# Altium PCB Mega-charger.PCBDOC
Units mil, origin at the board's own origin, x right, y up, seen from the top; angles counter-clockwise.
Board outline 6000 x 4000 mil, 2 copper layers (Top Layer, Bottom Layer); 3 components, 4 nets, 39 pads, 0 vias.
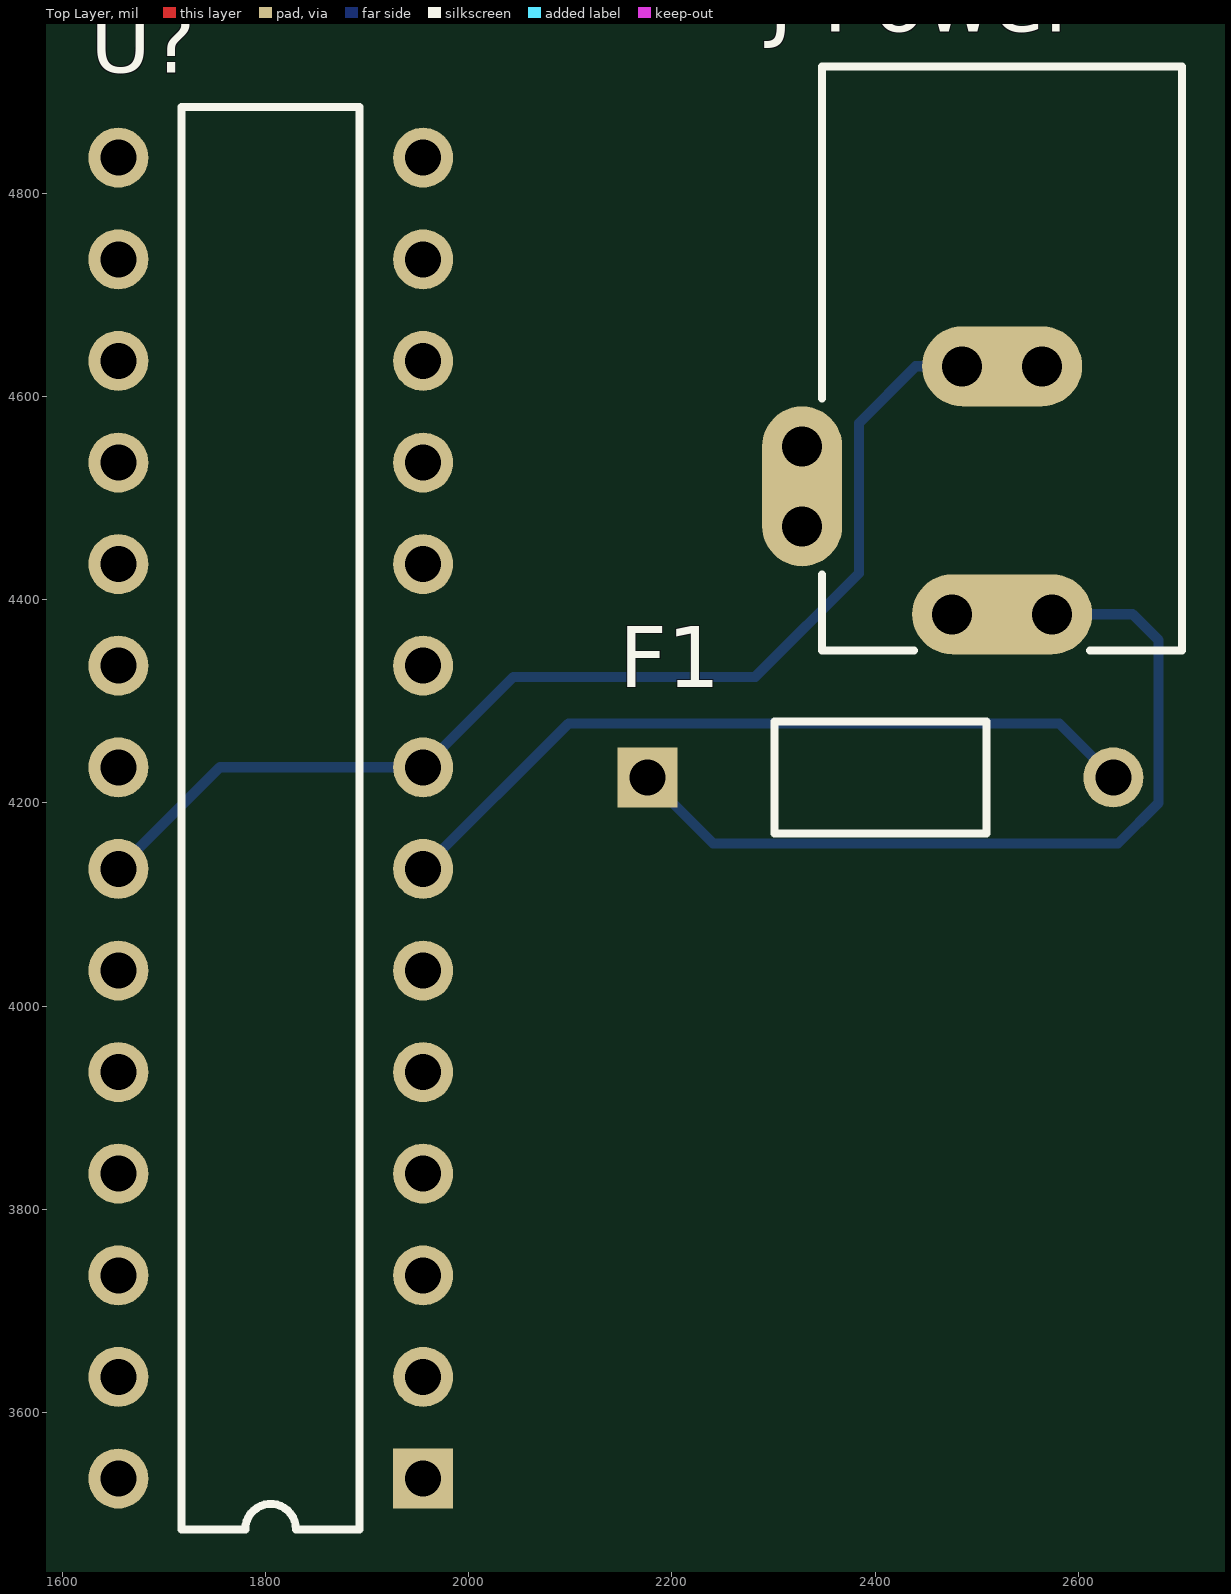
[diagram p0: Top Layer view]
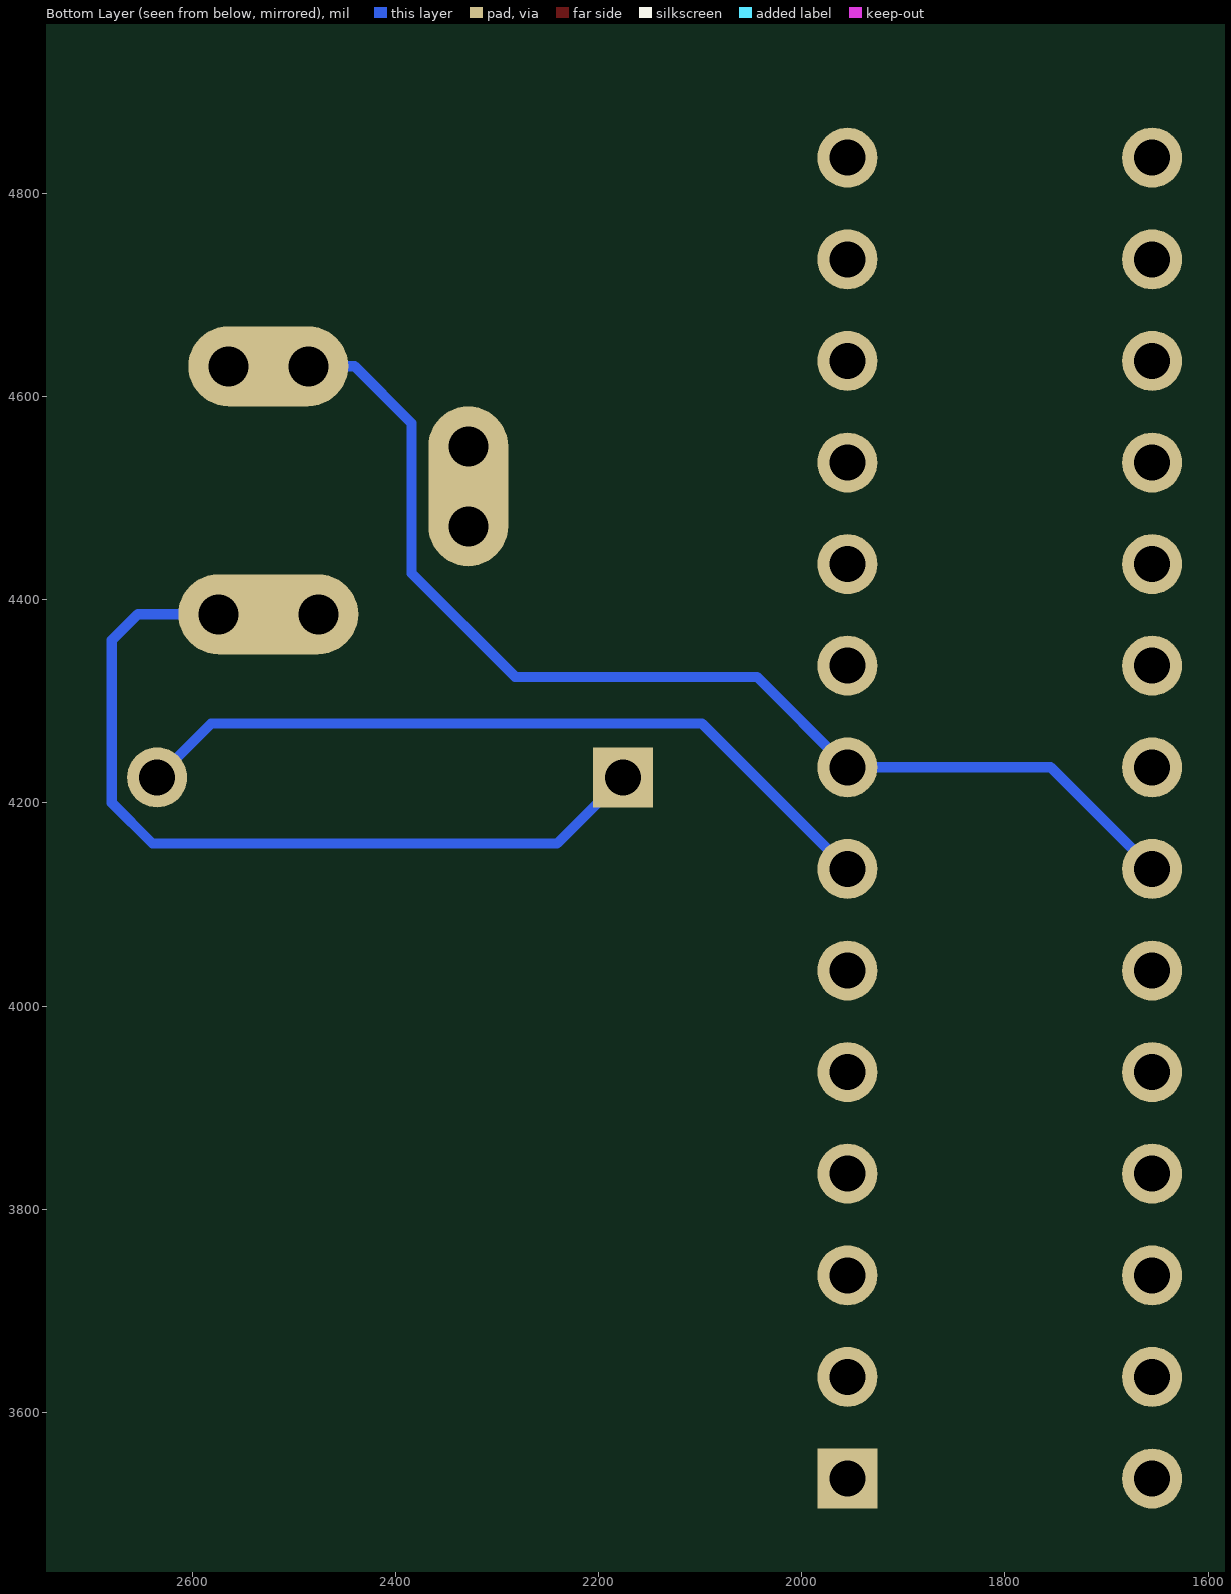
[diagram p1: Bottom Layer view, seen from below]

## Layer stack, top to bottom
Top Layer: signal copper 1.4
Dielectric: dielectric 12.6, FR-4, Dk 4.8
Bottom Layer: signal copper 1.4

## Board outline
1000,1000 7000,1000 7000,5000 1000,5000

## Design rules (kind name [scope] priority, off if disabled: settings)
Clearance [All] p1: gap=10
ComponentClearance [All] p1: gap=10 collisioncheckmode=3 verticalgap=10
PolygonConnect [All] p1: connectstyle=Relief reliefconductorwidth=10 reliefentries=4 polygonreliefangle="90 Angle"
RoomDefinition Mega-charger [InComponentClass('Mega-charger')] p1: confinementstyle=ConfineIn formatcopy=TRUE lockcomponents=FALSE outline 1605,3445 2730,3445 2730,4965 1605,4965
RoutingLayers [All] p1: top layer_v5=FALSE bottom layer_v5=TRUE
RoutingVias [All] p1: holewidth=28 width=50 viastyle="Through Hole" minholewidth=28 minwidth=50 maxholewidth=28 maxwidth=50
SolderMaskExpansion [All] p1: expansion=4
TestPointUsage [All] p1: valid=0 allowmultiple=FALSE
Testpoint [All] p1: side=15 testpointundercomponent=TRUE minsize=40 maxsize=100 preferedsize=60 minholesize=0 maxholesize=40 preferedholesize=32 testpointgrid=1 style=1023 order=0-112345678
Width [All] p1: maxlimit=10 minlimit=10 preferedwidth=10
16 further rules are at their usual default settings.

## Components (designator, comment, footprint, x,y, rotation, side; value= is the part's Value field where it differs from the comment)
F1 "Fuse 1" PIN-W2/E2.8 2405,4225 r0 top
J-Power "PWR2.5" KLD-0202 2525,4925 r270 top
U? "ATmega8L-8PC" 28P3 1805,4185 r90 top

## Footprints (in the part's own frame and the unit in brackets; to place one, negate y for a bottom-side part, rotate by r counter-clockwise, add the part's x,y. Pads: shape width x height; smd on the part's side, far side on the other; paste and mask are expansions set on the pad)
28P3 [mm] "DIP; 28 Leads; Row Spacing 7.62 mm; Pitch 2.54 mm"
  rect 1.5x1.5 hole 0.9: 1(-16.51,-3.81)
  round 1.5 hole 0.9: 2(-13.97,-3.81) 3(-11.43,-3.81) 4(-8.89,-3.81) 5(-6.35,-3.81) 6(-3.81,-3.81) 7(-1.27,-3.81) 8(1.27,-3.81) 9(3.81,-3.81) 10(6.35,-3.81) 11(8.89,-3.81) 12(11.43,-3.81) 13(13.97,-3.81) 14(16.51,-3.81) 15(16.51,3.81) 16(13.97,3.81) 17(11.43,3.81) 18(8.89,3.81) 19(6.35,3.81) 20(3.81,3.81) 21(1.27,3.81) 22(-1.27,3.81) 23(-3.81,3.81) 24(-6.35,3.81) 25(-8.89,3.81) 26(-11.43,3.81) 27(-13.97,3.81) 28(-16.51,3.81)
  silkscreen extent -17.78,-2.22 17.78,2.22
KLD-0202 [mm] "DC Power Jack, 2.5mm, KLD Series, PCB Mount"
  oval 2x4.5 all layers, no hole: 1(13.7,0)
  round 1.5 hole 1: 1A(13.7,-1.25) 1B(13.7,1.25) 2A(7.5,-1) 2B(7.5,1) 3A(9.5,-5) 3B(11.5,-5)
  oval 2x4 all layers, no hole: 2(7.5,0)
  oval 4x2 all layers, no hole: 3(10.5,-5)
  silkscreen extent 0,-4.5 14.6,4.5
PIN-W2/E2.8 [mm] "Fuse; 2 Leads"
  rect 1.5x1.5 hole 0.9: 1(-5.825,0)
  round 1.5 hole 0.9: 2(5.825,0)
  silkscreen extent -2.65,-1.4 2.65,1.4

## Part data
F1: "Fuse"
J-Power: "Low Voltage Power Supply Connector"
U?: "8-Bit AVR Microcontroller with 8K Bytes of In-System Programmable Flash Memory"

## Nets (pads, with @x,y where several pads share a name; then routed paths per layer and width w, separated by ;. In a path a pad name is that pad's centre, name@x,y a point inside that pad or via, vN(x,y) a via of type N, cw(c..) or ccw(c..) an arc to the next point about the centre after c; other vN are vias at no path point)
+5: F1.2 U?.7 | length 760.5
  Bottom Layer w10: U?.7 2098,4278 2581.33,4278 F1.2
GND: J-Power.2 J-Power.2A J-Power.2B U?.8 U?.22 | length 1200.8
  Bottom Layer w10: U?.22 1755,4235 U?.8 2044,4324 2282,4324 2384,4426 2384,4573.72 2440,4629.72 J-Power.2A J-Power.2 J-Power.2B
NetJ-Power_3: J-Power.3 J-Power.3A J-Power.3B | length 78.7
  Bottom Layer w10: J-Power.3B J-Power.3 J-Power.3A
VCC: F1.1 J-Power.1 J-Power.1A J-Power.1B | length 920.7
  Bottom Layer w10: F1.1 2240.67,4160 2639,4160 2679,4200 2679,4360 2653.37,4385.63 J-Power.1B J-Power.1 J-Power.1A
pads on no net: U?.1 U?.2 U?.3 U?.4 U?.5 U?.6 U?.9 U?.10 U?.11 U?.12 U?.13 U?.14 U?.15 U?.16 U?.17 U?.18 U?.19 U?.20 U?.21 U?.23 U?.24 U?.25 U?.26 U?.27 U?.28

## Text inside footprints (layer, text, board x,y; h text height)
J-Power: Mechanical 1 "Mech 2 - Clearance, move to internal plane if present" at 2724.44,4913.74 h11.81 r270; Mechanical 1 "Mech 1 - Slot cut-out" at 2744.13,4913.74 h11.81 r270; Mechanical 1 "Assign keep-out area to slot" at 2783.5,4913.74 h11.81 r270; Mechanical 1 "Alert PCB fab to slot details" at 2763.82,4913.74 h11.81 r270